# Altium PCB ROL2-C1.PcbDoc
Units mm, origin at the board's own origin, x right, y up, seen from the top; angles counter-clockwise.
Board outline 62 x 50 mm, 2 copper layers (Top Layer, Bottom Layer); 71 components, 64 nets, 253 pads, 75 vias.
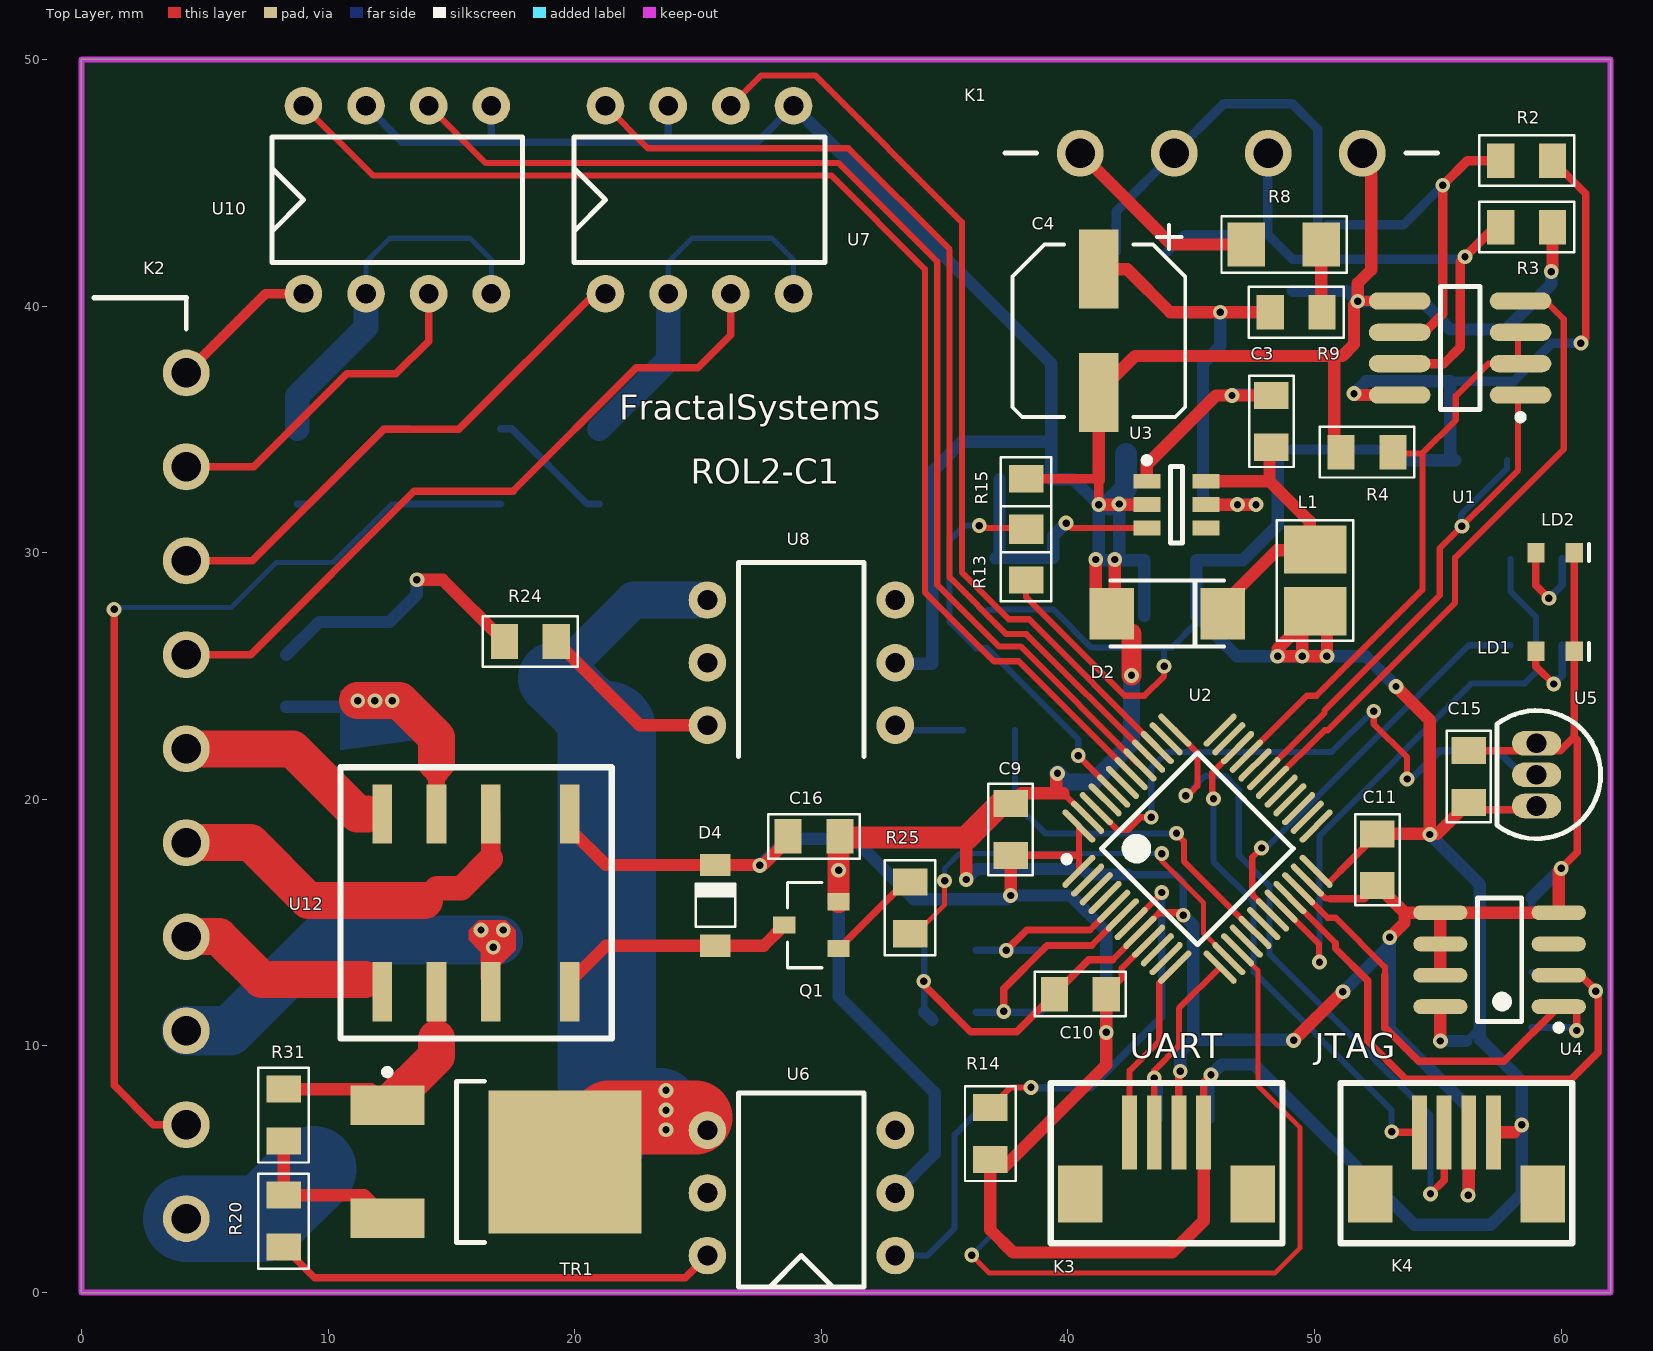
[diagram p0: Top Layer view]
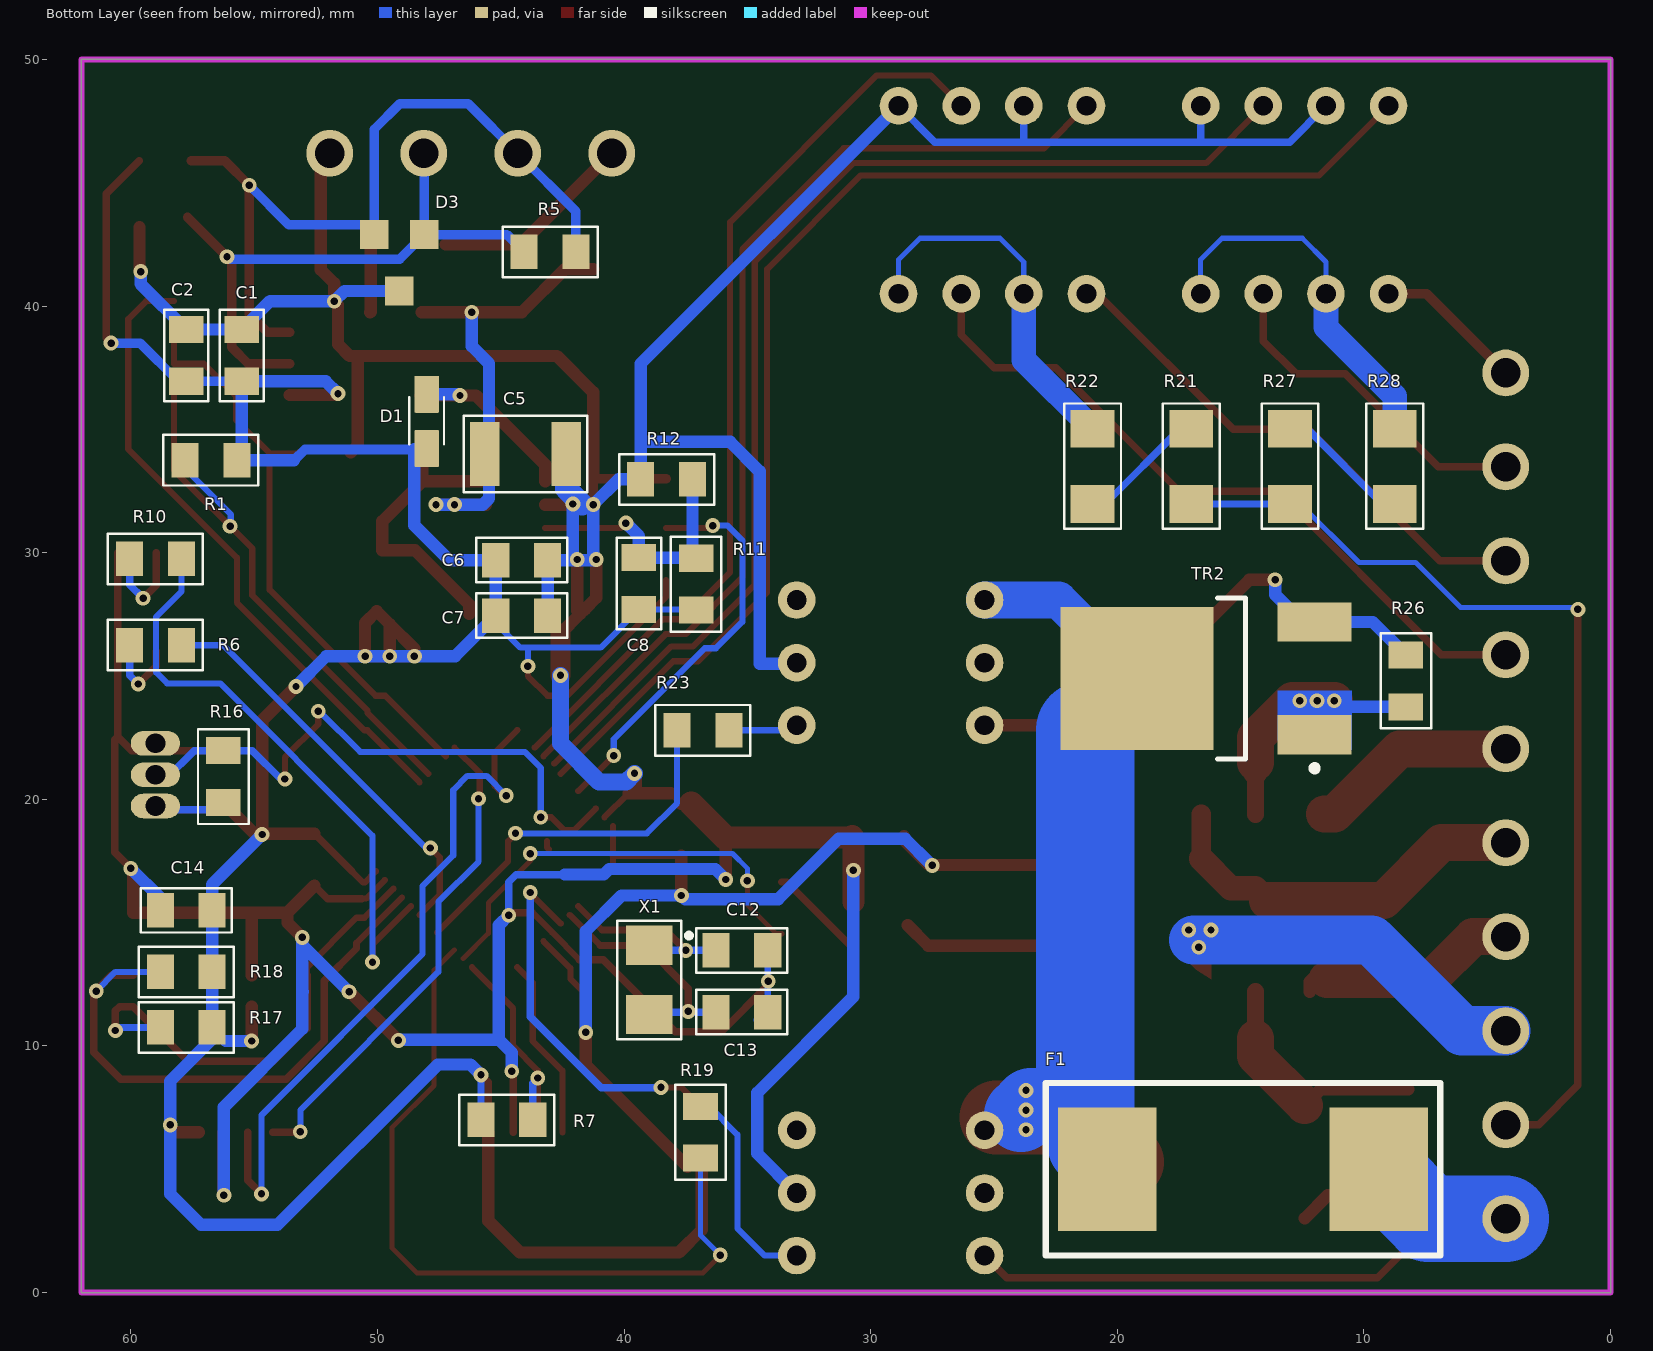
[diagram p1: Bottom Layer view, seen from below]

## Layer stack, top to bottom
Top Solder: solder mask 0.0102, Solder Resist, Dk 3.5
Top Layer: signal copper 0.0356
Dielectric 1: dielectric 0.32, FR-4, Dk 4.8
Bottom Layer: signal copper 0.0356
Bottom Solder: solder mask 0.0102, Solder Resist, Dk 3.5

## Board outline
0,0 0,50 62,50 62,0

## Design rules (kind name [scope] priority, off if disabled: settings)
Clearance ClearanceEdge [All vs OnLayer('Keep-Out Layer')] p1: gap=0.102
Clearance [All] p2: gap=0.203
DiffPairsRouting [All] p1: maxlimit=0.254 minlimit=0.254 mostfreqgap=0.254 toplayer_minwidth=0.381 toplayer_maxwidth=0.381 toplayer_prefwidth=0.381 bottomlayer_minwidth=0.381 bottomlayer_maxwidth=0.381 bottomlayer_prefwidth=0.381 maxuncoupledlength=12.7
HoleSize [All] p1: absolutevalues=TRUE maxlimit=6 minlimit=0.3 maxpercent=80.000 minpercent=20.000
HoleToHoleClearance [All] p1: gap=0.127 allowstackedmicrovias=TRUE
MinimumAnnularRing [All] p1: minimumring=0.15
MinimumSolderMaskSliver SilkscreenOverComponentPads [All] p2: minsoldermaskwidth=0.254
PolygonConnect [All] p1: connectstyle=Relief reliefconductorwidth=0.254 reliefentries=4 polygonreliefangle="90 Angle" airgapwidth=0.254
RoutingVias [All] p1: holewidth=0.711 width=1.27 viastyle="Through Hole" minholewidth=0.711 minwidth=1.27 maxholewidth=0.711 maxwidth=1.27
SilkToSilkClearance [All] p1: silktosilkclearance=0.2
SilkToSolderMaskClearance [IsPad] p1: minsilkscreentomaskgap=0.1 clearancetoexposedcopper=TRUE
SolderMaskExpansion [All] p1: expansion=0.1
UnpouredPolygon [All] p1: allowunpoured=FALSE
Width [All] p1: maxlimit=12.7 minlimit=0.203 preferedwidth=0.254
24 further rules are at their usual default settings.

## Classes and differential pairs
component class ROL2-C1-P01: C1 C2 C3 C4 C5 C6 C7 C8 C9 C10 C11 C12 C13 C14 C15 D1 D2 D3 K1 K3 K4 L1 LD1 LD2 R1 R2 R3 R4 R5 R6 R7 R8 R9 R10 R11 R12 R13 R14 R15 R16 R17 R18 U1 U2 U3 U4 U5 X1
component class ROL2-C1-P02: C16 D4 F1 K2 Q1 R19 R20 R21 R22 R23 R24 R25 R26 R27 R28 R31 TR1 TR2 U6 U7 U8 U10 U12
differential pair RS485: +RS485_P -RS485_N

## Components (designator, comment, footprint, x,y, rotation, side; value= is the part's Value field where it differs from the comment)
C1 "100n" CC0805-1 55.5,38 r270 bottom
C2 "1u" CC0805-1 57.75,38 r270 bottom
C3 "100n" CC0805-1 48.25,35.325 r90 top
C4 "10u" CAPPS-D6.3X7.7 41.25,39 r270 top
C5 "1u" CC1210-1 44,34 r0 bottom
C6 "10u" CC0805-1 44.15,29.7 r0 bottom
C7 "10u" CC0805-1 44.15,27.45 r0 bottom
C8 "DNI" CC0805-1 39.4,28.75 r270 bottom
C9 "100n" CC0805-1 37.675,18.775 r270 top
C10 "100n" CC0805-1 40.5,12.1 r0 top
C11 "100n" CC0805-1 52.55,17.55 r90 top
C12 "20p" CC0805-1 35.225,13.875 r0 bottom
C13 "20p" CC0805-1 35.225,11.375 r0 bottom
C14 "100n" CC0805-1 57.75,15.5 r180 bottom
C15 "100n" CC0805-1 56.25,20.925 r270 top
C16 "1u" CC0805-1 29.7,18.5 r180 top
D1 "1N4148" SOD323 48,35.325 r90 bottom
D2 "SS110B" DO-214AC 44.025,27.525 r0 top
D3 "PESD12VL2BT" SOT-23_NUP2105L(Primary) 48.1,42.9 r270 bottom
D4 "1N4148" SOD-123 25.7,15.7 r270 top
F1 "4A" FUSE-SMD-12mm 14.9,5 r180 bottom
K1 "Terminal Block Connector, 3.81mm, Right Angle" CONN_3.81_4 40.5,46.2 r0 top
K2 "Terminal Block Connector, 3.81mm, Right Angle" CONN_3.81_10 4.25,3 r90 top locked
K3 "BM04B-SRSS-TB" JST-SH-4pin 44,4 r180 top locked
K4 "BM04B-SRSS-TB" JST-SH-4pin 55.75,4 r180 top locked
L1 "10uH" IND-LQH32CN4R7M33l 50.025,28.875 r270 top
LD1 "GREEN" LEDGREENC190 59.75,26 r180 top
LD2 "YELLOW" LEDYELLOWC190 59.75,30 r180 top
Q1 "PMV40UN" SOT23-1 29.6,14.9 r180 top
R1 "10K" RC0805-1 56.75,33.75 r180 bottom
R2 "47K" RC0805-1 58.6,45.9 r0 top
R3 "47K" RC0805-1 58.6,43.2 r180 top
R4 "10K" RC0805-1 52.125,34.075 r0 top
R5 "DNI" RC0805-1 43,42.2 r0 bottom
R6 "470R" RC0805-1 59,26.25 r0 bottom
R7 "10K" RC0805-1 44.75,7 r180 bottom
R8 "FUSE" RC1206-1 48.75,42.5 r0 top
R9 "10R" RC0805-1 49.25,39.75 r0 top
R10 "470R" RC0805-1 59,29.75 r0 bottom
R11 "31K6" RC0805-1 37.075,28.725 r270 bottom
R12 "10K" RC0805-1 38.275,32.975 r180 bottom
R13 "DNI" RC0805-1 38.3,29.95 r270 top
R14 "10K" RC0805-1 36.85,6.45 r90 top
R15 "10K" RC0805-1 38.3,31.95 r90 top
R16 "10K" RC0805-1 56.25,20.925 r90 bottom
R17 "10K" RC0805-1 57.75,10.75 r0 bottom
R18 "10K" RC0805-1 57.75,13 r0 bottom
R19 "470R" RC0805-1 36.9,6.5 r270 bottom
R20 "470R" RC0805-1 8.2,2.9 r270 top
R21 "120K" RC1206-1 17,33.5 r90 bottom
R22 "120K" RC1206-1 21,33.5 r90 bottom
R23 "470R" RC0805-1 36.8,22.8 r0 bottom
R24 "470R" RC0805-1 18.2,26.4 r0 top
R25 "100R" RC0805-1 33.6,15.6 r270 top
R26 "DNI" RC0805-1 8.3,24.8 r90 bottom
R27 "120K" RC1206-1 13,33.5 r90 bottom
R28 "120K" RC1206-1 8.75,33.5 r90 bottom
R31 "DNI" RC0805-1 8.2,7.2 r270 top
TR1 "MAC4DHMT4G" ONSC-DPAK-3-369C-01_V 16.8,5.3 r0 top
TR2 "MAC4DHMT4G" ONSC-DPAK-3-369C-01_V 16.4,24.9 r0 bottom
U1 "SN65HVD08P" M08A_M 55.9,38.3 r180 top locked
U2 "STM32F030C8T6" STM-LQFP48_N 45.25,18 r45 top locked
U3 "MCP16331" MCHP-SOT-23-CH6_N 44.4,31.95 r0 top locked
U4 "LM75AIM" M08A_N 57.5,13.5 r180 top
U5 "DS18B20" TO92 59,21 r180 top
U6 "MOC3023" DIP6 33,1.5 r180 top
U7 "TLP620" DIP8 21.25,40.5 r90 top
U8 "MOC3023" DIP6 33,23 r180 top
U10 "TLP620" DIP8 9,40.5 r90 top
U12 "IM21GR" RELAY-SMD-2A 16,15.8 r180 top locked
X1 "8MHz" OSCCC150X320X9-2N_big 38.975,12.675 r270 bottom

## Footprints (in the part's own frame and the unit in brackets; to place one, negate y for a bottom-side part, rotate by r counter-clockwise, add the part's x,y. Pads: shape width x height; smd on the part's side, far side on the other; paste and mask are expansions set on the pad)
CAPPS-D6.3X7.7 [mm] "Capacitor polarised SMD D6.3; 6.6x6.6x7.7mm"
  rect 3.2x1.6 smd: 1(-2.5,0) 2(2.5,0)
  silkscreen extent -4.3,-3.5 3.5,3.5, body extent -3.3,-3.3 3.3,3.3, height 7.71
CC0805-1 [mm] "Chip capacitor  0805"
  rect 1.1x1.4 smd: 1(-1.05,0) 2(1.05,0)
  silkscreen extent -1.85,-0.9 1.85,0.9, body extent -1,-0.63 1,0.63, height 1
CC1210-1 [mm] "Chip capacitor 1210 (3225)"
  rect 1.2x2.6 smd: 1(-1.65,0) 2(1.65,0)
  silkscreen extent -2.5,-1.55 2.5,1.55, body extent -1.6,-1.25 1.6,1.25, height 1.5
CONN_3.81_4 [mm]
  round 1.9 hole 1.2: 1(0,0) 2(3.81,0) 3(7.62,0) 4(11.43,0)
  silkscreen extent -3.05,0 14.48,0
CONN_3.81_10 [mm]
  round 1.9 hole 1.2: 1(0,0) 2(3.81,0) 3(7.62,0) 4(11.43,0) 5(15.24,0) 6(19.05,0) 7(22.86,0) 8(26.67,0) 9(30.48,0) 10(34.29,0)
  silkscreen extent 36.07,0 37.34,3.75
DIP6 [mil]
  round 60 hole 31.5: 1(0,0) 2(0,-100) 3(0,-200) 4(300,-200) 5(300,-100) 6(300,0)
  silkscreen extent 50,-260 250,50
DIP8 [mil]
  round 60 hole 31.5: 1(0,0) 2(0,-100) 3(0,-200) 4(0,-300) 5(300,-300) 6(300,-200) 7(300,-100) 8(300,0)
  silkscreen extent 50,-350 250,50
DO-214AC [mm]
  rect 1.8x2.1 smd: A(-2.25,0) K(2.25,0)
  silkscreen extent -2.3,-1.33 2.3,1.35, body extent -2.3,-1.43 2.3,1.5, height 2.61
FUSE-SMD-12mm [mm] "fuse, 12.1mm X 4.5m X 4.5mm"
  rect 4x5 smd mask+0.051: 1(-5.5,0) 2(5.5,0)
  silkscreen extent -8,-3.5 8,3.5
IND-LQH32CN4R7M33l [mm] "Inductor,Molded Body;3.20mm L X 2.50mm W X 2.20mm H"
  rect 1.95x2.55 smd: 1(-1.25,0) 2(1.25,0)
  silkscreen extent -2.45,-1.55 2.45,1.55, body extent -1.63,-1.28 1.63,1.28, height 2.2
JST-SH-4pin [mm]
  rect 1.8x2.3 smd: 0(3.5,0) ""(-3.5,0)
  rect 0.6x3 smd: 1(-1.5,-2.5) 2(-0.5,-2.5) 3(0.5,-2.5) 4(1.5,-2.5)
  silkscreen extent -4.7,-4.5 4.7,2
LEDGREENC190 [mm] "LED chip C190 1.6x0.8x0.8mm vertical"
  rect 0.7x0.8 smd: 1(-0.775,0) 2(0.775,0)
  silkscreen extent -1.38,-0.35 -1.37,0.35, body extent -0.8,-0.4 0.8,0.4, height 0.8
LEDYELLOWC190 [mm] "LED chip C190 1.6x0.8x0.8mm vertical"
  rect 0.7x0.8 smd: 1(-0.775,0) 2(0.775,0)
  silkscreen extent -1.38,-0.35 -1.38,0.35, body extent -0.8,-0.4 0.8,0.4, height 0.8
M08A_M [mm] "SOIC, 8-Leads, Body 4.9x3.9mm, Pitch 1.27mm, IPC Low Density"
  oval 2.5x0.7 smd: 1(-2.45,1.905) 2(-2.45,0.635) 3(-2.45,-0.635) 4(-2.45,-1.905) 5(2.45,-1.905) 6(2.45,-0.635) 7(2.45,0.635) 8(2.45,1.905)
  silkscreen extent -2.58,-2.5 0.8,2.93, body extent -2,-2.5 2,2.5, height 1.75
M08A_N [mm] "SOIC, 8-Leads, Body 4.9x3.9mm, Pitch 1.27mm, IPC Medium Density"
  oval 2.2x0.6 smd: 1(-2.4,1.905) 2(-2.4,0.635) 3(-2.4,-0.635) 4(-2.4,-1.905) 5(2.4,-1.905) 6(2.4,-0.635) 7(2.4,0.635) 8(2.4,1.905)
  silkscreen extent -2.53,-2.5 0.9,2.88, body extent -2,-2.5 2,2.5, height 1.75
MCHP-SOT-23-CH6_N [mm] "SOT23, 6-Leads, Body 2.9x1.55mm, Pitch 0.95mm, IPC Medium Density"
  rect 1.1x0.6 smd: 1(-1.2,0.95) 2(-1.2,0) 3(-1.2,-0.95) 4(1.2,-0.95) 5(1.2,0) 6(1.2,0.95)
  silkscreen extent -1.32,-1.55 0.25,1.92, body extent -0.9,-1.55 0.9,1.55, height 1.45
ONSC-DPAK-3-369C-01_V [mm] "DPAK, 3-Leads, Body 6.54x6.095mm, Pitch 2.29mm"
  rect 3x1.6 smd: 1(-4.4,2.29) 3(-4.4,-2.29)
  rect 6.2x5.8 smd: 4(2.8,0)
  silkscreen extent -4.52,-3.27 -0.45,3.76, body extent -1.6,-3.27 4.49,3.27, height 2.38
OSCCC150X320X9-2N_big [mm] "Oscillator, 1.5mm X 3.2m X 0.9mm"
  rect 1.6x1.9 smd mask+0.051: 1(-1.4,0) 2(1.4,0)
  silkscreen extent -2.4,-1.3 2.4,1.71, body extent -1.6,-0.8 1.5,0.8, height 2.5
RC0805-1 [mm] "Chip resistor 0805"
  rect 1.1x1.4 smd: 1(-1.05,0) 2(1.05,0)
  silkscreen extent -1.92,-1.02 1.92,1.02, body extent -1.02,-0.64 1.02,0.64, height 0.51
RC1206-1 [mil] "Chip resistor 1206"
  rect 60x70 smd: 1(-60,0) 2(60,0)
  silkscreen extent -99,-45 100,45, body extent -60,-30 60,30, height 22
RELAY-SMD-2A [mm]
  rect 0.8x2.4 smd: 1(-3.8,-3.6) 2(-0.6,-3.6) 3(1.6,-3.6) 4(3.8,-3.6) 5(3.8,3.6) 6(1.6,3.6) 7(-0.6,3.6) 8(-3.8,3.6)
  silkscreen extent -5.5,-5.5 5.5,5.5
SOD323 [mm]
  rrect10% 1.5x1 smd: 1(1.1,0) 2(-1.1,0)
  silkscreen extent -0.92,-0.7 0.98,0.7, body extent -1.3,-0.67 1.3,0.67, height 0.8
SOD-123 [mm]
  rect 0.91x1.22 smd: 1(-1.637,0) 2(1.637,0)
  silkscreen extent -0.88,-0.8 0.87,0.8, body extent -1.93,-0.85 1.93,0.85, height 1.42
SOT23-1 [mm]
  rect 0.9x0.7 smd: 1(-1.1,0.95) 2(-1.1,-0.95) 3(1.1,0)
  silkscreen extent -0.43,-1.73 0.97,1.73, body extent -1.28,-1.55 1.28,1.55, height 1.02
SOT-23_NUP2105L(Primary) [mil]
  rect 46x46 smd: A(0,0) b(0,-80) k(90,-40)
STM-LQFP48_N [mm] "QFP, 48-Leads, Body 7x7mm, Pitch 0.5mm, IPC Medium Density"
  oval 1.8x0.25 smd: 1(-4.05,2.75) 2(-4.05,2.25) 3(-4.05,1.75) 4(-4.05,1.25) 5(-4.05,0.75) 6(-4.05,0.25) 7(-4.05,-0.25) 8(-4.05,-0.75) 9(-4.05,-1.25) 10(-4.05,-1.75) 11(-4.05,-2.25) 12(-4.05,-2.75) 25(4.05,-2.75) 26(4.05,-2.25) 27(4.05,-1.75) 28(4.05,-1.25) 29(4.05,-0.75) 30(4.05,-0.25) 31(4.05,0.25) 32(4.05,0.75) 33(4.05,1.25) 34(4.05,1.75) 35(4.05,2.25) 36(4.05,2.75)
  oval 0.25x1.8 smd: 13(-2.75,-4.05) 14(-2.25,-4.05) 15(-1.75,-4.05) 16(-1.25,-4.05) 17(-0.75,-4.05) 18(-0.25,-4.05) 19(0.25,-4.05) 20(0.75,-4.05) 21(1.25,-4.05) 22(1.75,-4.05) 23(2.25,-4.05) 24(2.75,-4.05) 37(2.75,4.05) 38(2.25,4.05) 39(1.75,4.05) 40(1.25,4.05) 41(0.75,4.05) 42(0.25,4.05) 43(-0.25,4.05) 44(-0.75,4.05) 45(-1.25,4.05) 46(-1.75,4.05) 47(-2.25,4.05) 48(-2.75,4.05)
  silkscreen extent -4.17,-2.75 2.75,3.57, body extent -3.5,-3.5 3.5,3.5, height 1.6
TO92 [mm] "TO92"
  oval 2x1 hole 0.8: 1(0,-1.27) 2(0,0) 3(0,1.27)
  silkscreen extent -2.6,-2.6 1.6,2.6, body extent -2.61,-2.61 1.6,2.61, height 5.33

## Part data
C1 C2 C3 C8 C16: library part CAPCC0805_1U50VX7R, "Capacitor chip ceramic 0805"
C4: library part CAPPS100U25VFP, "Capacitor electrolitic SMD 6.3X6.3X7.7MM low ESR"
C5: library part CAPCC1210_1U100VX7R, "Capacitor chip ceramic 1210"
C6 C7: library part CAPCC0805_10U16VX5R, "Capacitor chip ceramic 0805"
C9 C10 C11 C12 C13 C14 C15: library part CAPCC0805_100N50VX7R, "Capacitor chip ceramic 0805"
D1 D4: library part D-1N4148WS, "Small Signal Diode"
D2: library part CD214A-B240LF-0.3V@1A, "Schottky Diode"
D3: library part NUP2105L, "Diode"
F1: library part FUSE-4A-0464004.DR, "SMD Fuse"
K1: library part CONN_TB_3.81_4PIN, "Terminal Block Connector, 3.81mm, 4pin"
K2: library part CONN_TB_3.81_10PIN, "Terminal Block Connector, 3.81mm, 8pin"
K3 K4: library part JST-SH-BM04B-SRSS-TB, "JST connector 4pin vertical"
L1: library part LQH44PN100MP0L, "Chip Inductor 4 x 4 mm"
LD1: library part LED-GREEN0603V, "LED green HSMG vertical"
LD2: library part LED-YELLOW0603V, "LED yellow HSMY vertical"
Q1: library part Q-PMV40UN, "TrenchMOS ultra low level FET N-channel"
R1 R2 R3 R4 R5 R6 R7 R9 R10 R11 R12 R13 R14 R15 R16 R17 R18 R19 R20 R23 R24 R25 R26 R31: library part RES0805, "Chip Resistor 0805"
R8 R21 R22 R27 R28: library part RES1206, "Chip Resistor 1206"
TR1 TR2: "Sensitive Gate Triacs, 3-Pin DPAK, Pb-Free, Tape and Reel"
U1: "3.3 / 5 V RS-485 Transceiver, 10 Mbps, Half Duplex, -40 to 85 degC, 8-pin PDIP (P), Pb-Free (RoHS)"
U2: "ARM Cortex-M0 32-bit MCU, 64 KB Flash, 8 KB Internal RAM, 39 I/Os, 48-pin LQFP, -40 to 85 degC, Tray"
U3: library part MCP16301T-E/CH, "High-Voltage Input Integrated Switch Step-Down Regulator, 600 mA, Input Voltage 4.0 to 30 V, Output Voltage 2.0 to 15 V, -40 to 125 degC, 6-pin SOT-23 (CH6), Tape and Reel"
U4: "Digital Temperature Sensor and Thermal Watchdog with Two-Wire Interface, 8-pin Narrow SOIC"
U5 U6 U7 U8 U10: "digital temperature sensor"
U12: library part relay-SMD-IM21GR, "relay SMD 250VAC 2A"
X1: library part XTAL-SMD_8MHz, "SMD Crystal 8MHz"

## Via types
v1: diameter 0.6, hole 0.3, Top Layer to Bottom Layer, tented both sides, 75 vias

## Nets (pads, with @x,y where several pads share a name; then routed paths per layer and width w, separated by ;. In a path a pad name is that pad's centre, name@x,y a point inside that pad or via, vN(x,y) a via of type N, cw(c..) or ccw(c..) an arc to the next point about the centre after c; other vN are vias at no path point)
+3V3: C1.2 C2.2 C6.2 C7.2 C8.2 C9.2 C10.2 C11.2 C14.2 C15.2 C16.2 D1.2 D4.1 K3.1 K4.1 L1.2 R1.2 R2.2 R7.1 R11.2 R13.2 R14.1 R16.1 R17.1 R18.1 U1.8 U2.1 U2.9 U2.24 U2.48 U4.8 U5.3 U12.1 | length 202.6
  Top Layer w0.25: R13.2 38.3,28.2 42.3,24.2 43.1,24.2 43.9,25 v1(43.9,25.4) ; U2.1 40.442,17.725 U2.48 ; C10.2 42.175,12.725 42.175,13.157 U2.9 ; U2.24 50.514,16.625 50.575,16.625 51.031,17.081
  Top Layer w0.3: C9.2 40.442,17.725 ; C10.2 C10.2@41.55,12.532 ; K3.1 45.5,8.525 v1(45.8,8.825) ; 51.031,17.081 C11.2 ; C15.2 56.545,19.58 58.85,19.58 U5.3 ; 58.1,6.5 v1(58.4,6.8) ; R2.2 61,44.55 61,38.7 v1(60.8,38.5)
  Top Layer w0.5: U12.1 19.8,18.8 21.263,17.337 D4.1 27.637,17.337 28.65,18.35 C16.2 ; R14.1 36.85,2.55 37.775,1.625 44.225,1.625 45.5,2.9 K3.1 ; R14.1@37.425,5.1 41.55,9.225 v1(41.55,10.55) C10.2 ; v1(37.675,16.1) C9.2 ; v1(51.6,36.45) 51.655,36.395 U1.8@53.55,36.395 ; C11.2 v1@54.675,18.6 ; v1(53.3,24.575) 54.675,23.2 v1@54.675,18.6 ; v1(55.1,10.2) U4.8 ; C15.2 54.975,18.6 v1@54.675,18.6 ; K4.1 58.1,6.5 ; v1(49.5,25.8) L1.2@49.5,27.1 ; v1(49.5,25.8) v1(50.5,25.8) 50.5,27.15 L1.2 L1.2@49.5,27.1 ; v1(49.5,25.8) v1(48.5,25.8) 48.5,26.1 L1.2@49.5,27.1
  Bottom Layer w0.25: R11.2@36.75,27.675 R11.2 37.1,27.7 C8.2 40.95,26.15 43.9,26.15 ; v1(43.9,25.4) 43.9,26.15 ; C7.2 45.2,27.15 44.2,26.15 43.9,26.15
  Bottom Layer w0.3: R7.1 v1(45.8,8.825) v1@45.875,8.9 ; R17.1@56.15,10.2 R17.1 ; R16.1 56.545,19.58 U5.3@58.85,19.58
  Bottom Layer w0.381: C1.2 C2.2 58.075,36.95 59.625,38.5 v1(60.8,38.5)
  Bottom Layer w0.4: D1.2 48.035,34.19 48.5,34.19 52.94,34.19 53.38,33.75
  Bottom Layer w0.5: v1@27.6,17.4 28.6,18.4 31.3,18.4 33.753,15.947 37.522,15.947 v1(37.675,16.1) 40.1,16.1 41.55,14.65 v1(41.55,10.55) ; v1@45.875,8.9 46.225,9.25 47.55,9.25 54.05,2.75 57.15,2.75 58.4,4 v1(58.4,6.8) 58.4,8.575 56.7,10.275 R17.1 C14.2 56.7,16.55 v1(54.675,18.575) ; D1.2@48.5,34.19 48.5,31.1 47.1,29.7 C6.2 C7.2 46.85,25.8 v1(48.5,25.8) v1(49.5,25.8) v1(50.5,25.8) 52.075,25.8 v1(53.3,24.575) ; v1@51.625,36.475 52.1,36.95 C1.2 55.5,33.95 R1.2 53.38,33.75 ; v1(55.1,10.2) R17.1@56.15,10.2
  other v1: 27.5,17.321
+VCC: K1.1 R8.1 | length 8.3
  Top Layer w0.5: K1.1 44.2,42.5 R8.1
GND: C1.1 C2.1 C4.2 C5.1 C6.1 C7.1 C9.1 C10.1 C11.1 C12.1 C13.1 C14.1 C15.1 C16.1 D2.A D3.k K1.4 K3.2 K4.2 LD1.1 LD2.1 Q1.2 R3.1 R4.1 R12.1 R15.2 U1.5 U2.8 U2.23 U2.47 U3.2 U4.4 U4.5 U4.6 U4.7 U5.1 U6.2 U7.5 U7.7 U8.2 U10.5 U10.7 | length 263
  Top Layer w0.25: C9.1 C9.1@38.1,20.25 ; 39.818,20.25 U2.47 ; D2.A@41.475,27.625 D2.A@41.575,27.725 ; 41.811,13.5 U2.8 43.711,15.4 ; U2.23 50.457,15.975 50.625,15.975
  Top Layer w0.3: v1(34.15,12.625) 34.15,12.475 36.05,10.575 37.925,10.575 C10.1 40.85,13.5 41.811,13.5 ; 43.711,15.4 44.575,15.4 v1(44.675,15.3) ; K3.2 44.5,8.925 v1(44.55,8.975) ; 50.625,15.975 52.025,15.975 C11.1 ; C15.1 59.955,21.975 60.525,22.545 ; U4.4 60,15.505 v1(60,17.2) 60.65,17.85 60.65,22.42 60.525,22.545 ; LD2.1 LD1.1 60.525,22.545
  Top Layer w0.4: R15.2 41.2,33 41.25,32.95 v1(41.25,31.95) ; v1@51.75,40.3 51.845,40.205 U1.5@53.55,40.205
  Top Layer w0.5: v1(35.875,16.75) 35.875,18.425 35.9,18.45 ; C9.1@37.275,19.825 C9.1 ; C9.1@38.1,20.25 39.525,20.25 ; v1(39.575,21.05) 39.525,21 39.525,20.25 ; 39.818,20.25 39.525,20.25 ; v1(41.125,29.725) 41.125,28.175 41.575,27.725 D2.A ; v1(41.25,31.95) U3.2 ; 41.25,32.95 C4.2 42.725,37.975 50.825,37.975 ; v1(41.9,29.725) 41.9,27.65 D2.A ; D2.A@42.575,26.725 D2.A ; v1(49.15,10.225) 51.125,12.2 v1(51.15,12.2) ; R4.1 50.8,34.35 50.8,37.95 50.825,37.975 ; K1.4@52.3,46 52.3,41.475 51.75,40.925 51.75,40.3 v1(51.75,40.2) 51.6,40.05 51.6,38.45 51.125,37.975 50.825,37.975 ; C11.1 53.645,15.405 ; v1(53.05,14.4) 53.645,14.995 53.645,15.405 ; U4.7 U4.6 U4.5 ; v1@56.25,4.025 K4.2 ; v1(59.6,41.4) 59.65,41.45 R3.1 ; v1(60,17.2) 59.9,17.1 U4.4 U4.5 ; 53.645,15.405 U4.5
  Top Layer w0.8: v1(42.575,25.025) D2.A@42.575,26.725
  Top Layer w0.9: Q1.2 C16.1@30.7,18.45 ; C16.1 C16.1@30.7,18.45 ; 35.9,18.45 C16.1@30.7,18.45
  Top Layer w1: 35.9,18.45 C9.1@37.275,19.825
  Bottom Layer w0.25: C13.1 C12.1
  Bottom Layer w0.3: U10.7 13.01,46.65 16.575,46.65 ; U10.5 16.62,46.695 16.575,46.65 ; U7.7 23.79,46.665 23.775,46.65 ; U7.5 27.4,46.65 23.775,46.65 ; 42.4,16.95 44.375,16.95 44.675,16.65 v1(44.675,15.3) ; C14.1 C14.1@58.8,16 ; 16.575,46.65 23.775,46.65
  Bottom Layer w0.5: U7.5 39.325,37.665 39.325,34.5 ; v1@30.7,17.1 30.7,12 34.6,8.1 34.6,5.64 U6.2 ; U8.2 33.04,25.5 34.5,25.5 34.5,33.3 35.7,34.5 39.325,34.5 ; C13.1 C13.1@34.5,11.05 ; v1(35.875,16.75) 36.3,17.175 40.6,17.175 40.825,16.95 42.4,16.95 ; v1(41.125,29.725) 41.25,29.85 v1(41.25,31.95) ; v1@41.225,29.7 C6.1 C7.1 ; v1(41.9,29.725) 42.075,29.9 v1@42.075,31.95 ; v1(42.075,31.975) v1@42.075,31.95 ; v1(44.55,8.975) 44.55,9.725 45.075,10.25 ; v1(44.675,15.3) 45.075,14.9 45.075,10.25 ; D3.k 51.336,40.614 v1(51.75,40.2) 54.35,40.2 C1.1 C2.1 59.6,40.9 v1(59.6,41.4) ; v1(49.15,10.225) 49.125,10.25 45.075,10.25 ; v1(51.15,12.2) 53.05,14.1 ; 53.025,12.2 53.05,12.175 ; v1(53.05,14.4) 53.05,14.1 ; v1(56.225,3.95) 56.225,7.525 53.05,10.7 53.05,12.175 ; C14.1@58.8,16 v1(60,17.2) ; 39.325,34.5 R12.1 40.225,32.975 v1(41.25,31.95) ; v1(41.25,31.95) 41.7,31.95 v1@42.075,31.95 ; 53.05,12.175 53.05,14.1
  Bottom Layer w0.7: v1(39.575,21.05) 39.925,20.7 41,20.7 42.575,22.275 v1(42.575,25.025)
  Bottom Layer w0.9: 41.7,31.95 42.35,32.6 C5.1
  other v1: 30.7,17.121
I2C_CLK: R18.2 U2.21 U4.2 | length 24.8
  Top Layer w0.25: U2.21 50.85,14.168 50.85,14.163
  Top Layer w0.3: 50.85,14.163 50.85,13.95 52.15,12.65 52.15,10.2 53.7,8.65 60.4,8.65 61.5,9.75 61.5,12.15 60.785,12.865 U4.2
  Bottom Layer w0.25: R18.2 60.625,13 v1(61.4,12.225)
I2C_DAT: R17.2 U2.22 U4.1 | length 19.3
  Top Layer w0.25: U2.22 50.525,15.2 50.85,15.2 52.85,13.2 52.85,12.875
  Top Layer w0.3: 52.85,10.725 52.85,12.875 ; 52.863,10.738 54.225,9.375 57.68,9.375 U4.1 60.455,11.595 60.625,11.425 v1(60.625,10.625)
  Bottom Layer w0.3: R17.2 60.5,10.75 v1(60.625,10.625)
INP1: U2.39 U7.6 | length 37.4
  Top Layer w0.25: U7.6 27.56,49.35 29.75,49.35 35.7,43.4 35.7,29.2 37.6,27.3 38.425,27.3 U2.39
INP2: U2.40 U7.8 | length 40.7
  Top Layer w0.25: U7.8 22.97,46.4 31.1,46.4 35.2,42.3 35.2,29 37.5,26.7 38.318,26.7 U2.40
INP3: U2.41 U10.6 | length 47.5
  Top Layer w0.25: U10.6 16.4,45.8 30.7,45.8 34.7,41.8 34.7,28.7 37.2,26.2 38.08,26.2 U2.41@42.827,21.452
INP4: U2.42 U10.8 | length 52.5
  Top Layer w0.25: U10.8 11.82,45.3 30.4,45.3 34.2,41.5 34.2,28.4 37,25.6 38.004,25.6 U2.42
INP5: U2.43
INP6: U2.45
LED1: R6.1 U2.19 | length 16.9
  Top Layer w0.25: v1(47.85,18.025) 47.475,17.65 47.475,16.129 U2.19
  Bottom Layer w0.25: v1@47.85,17.85 v1(47.85,18.025) 48.025,18.025 56.25,26.25 R6.1
LED2: R10.1 U2.20 | length 24.5
  Top Layer w0.25: U2.20 50.175,14.136 v1@50.175,13.475
  Bottom Layer w0.25: v1(50.2,13.4) 50.2,18.525 56.375,24.7 58.525,24.7 58.975,25.15 58.975,27.4 57.95,28.425 R10.1
LINE: F1.1 TR1.4 TR2.4 U6.4 U8.4 | length 39.2
  Top Layer w3: TR1.4 21.4,7.1 U6.4@24.9,7.1
  Bottom Layer w0.7: v1@23.9,7.2 24.76,7.2 U6.4
  Bottom Layer w1.5: TR2.4 22.38,28.08 U8.4
  Bottom Layer w3: TR2.4 TR2.4@21.3,22.8 ; F1.1 21.3,5.9 21.3,7.6 23.5,7.6 v1@23.9,7.2
  Bottom Layer w4: 21.3,7.6 TR2.4@21.3,22.8
  other v1: 23.7,6.6 23.7,7.4 23.7,8.2
N: K2.2 R21.1 R27.1 | length 40.3
  Top Layer w0.3: v1(1.325,27.7) 1.325,8.4 2.915,6.81 K2.2
  Bottom Layer w0.203: v1(1.325,27.7) 1.4,27.775 6.075,27.775 7.9,29.6 10.2,29.6 12.576,31.976 R27.1
  Bottom Layer w0.3: R27.1 R21.1
NetC3_1: C3.1 D2.K L1.1 U3.6 | length 12.3
  Top Layer w0.5: U3.6 48.175,32.9 ; D2.K 46.275,27.9 48.475,30.1 49.8,30.1 49.8,31.275 48.175,32.9 ; C3.1 48.175,34.2 48.175,32.9
NetC3_2: C3.2 D1.1 U3.1 | length 8.3
  Top Layer w0.5: U3.1 43.2,33.575 46,36.375 C3.2
  Bottom Layer w0.5: v1(46.65,36.375) 46.7,36.425 D1.1
NetC4_1: C4.1 C5.2 R9.1 U3.5 | length 19.8
  Top Layer w0.5: C4.1 42.4,41.5 44.15,39.75 v1(46.175,39.75) R9.1 ; U3.5 v1(46.875,31.95) v1(47.625,31.95)
  Bottom Layer w0.5: v1(46.175,39.75) 46.175,38.375 45.475,37.675 45.475,32.2 45.725,31.95 v1(46.875,31.95) v1(47.625,31.95)
NetC8_1: C8.1 R11.1 R12.2 U3.3 | length 10.5
  Top Layer w0.25: v1(39.925,31.2) 40.125,31 U3.3
  Bottom Layer w0.5: R11.1 R11.1@37.1,29.8 ; R12.2 37.225,29.925 R11.1@37.1,29.8 ; v1(39.925,31.2) 39.4,30.675 C8.1 R11.1@37.1,29.8
NetC12_2: C12.2 U2.5 X1.1 | length 7.8
  Top Layer w0.25: 40.889,14.7 U2.5
  Top Layer w0.3: v1(37.5,13.875) 38.325,14.7 40.889,14.7
  Bottom Layer w0.3: C12.2 v1(37.5,13.875) X1.1@38.975,13.875
NetC13_2: C13.2 U2.6 X1.2 | length 9.8
  Top Layer w0.25: 40.971,14.075 U2.6
  Top Layer w0.3: v1(37.4,11.4) 37.4,12.325 39.15,14.075 ; 39.075,14 39.15,14.075 ; 40.971,14.075 39.15,14.075
  Bottom Layer w0.3: C13.2 38.875,11.375 X1.2@38.975,11.475
NetD4_2: D4.2 Q1.3 U12.8 | length 10.1
  Top Layer w0.5: U12.8 19.8,12.6 21.263,14.062 D4.2 27.662,14.062 Q1.3
NetF1_2: F1.2 K2.1 | length 6
  Bottom Layer w3.5: K2.1 7.4,3 F1.2
NetK2_3: K2.3 U12.7 | length 14.2
  Bottom Layer w2: K2.3 6.02,10.62 9.7,14.3 16.9,14.3
  other v1: 16.7,14 16.2,14.7 17.1,14.7
NetK2_4: K2.4 U12.5 | length 9.1
  Top Layer w0.5: 11.7,13.1 12.2,12.6 U12.5
  Top Layer w1.5: K2.4 5.57,14.43 7.3,12.7 11.5,12.7
NetK2_5: K2.5 U12.2 | length 15.8
  Top Layer w0.8: 16.6,17.6 U12.2
  Top Layer w1: 13.9,15.9 14.4,16.4 15.4,16.4 16.6,17.6
  Top Layer w1.5: K2.5 6.86,18.24 9.2,15.9 13.9,15.9
NetK2_6: K2.6 U12.4 | length 8.6
  Top Layer w1: K2.6 K2.6@4.7,22.05
  Top Layer w1.5: K2.6 K2.6@4.365,22.165 ; K2.6@4.7,22.05 8.55,22.05 11.2,19.4 11.6,19.4
NetLD1_2: LD1.2 R6.2 | length 3.3
  Top Layer w0.3: LD1.2 58.975,25.4 v1(59.7,24.675)
  Bottom Layer w0.3: v1(59.7,24.675) 60.05,25.025 R6.2
NetLD2_2: LD2.2 R10.2 | length 3.9
  Top Layer w0.3: LD2.2 58.975,28.675 v1(59.5,28.15)
  Bottom Layer w0.3: v1(59.5,28.15) 60.05,28.7 R10.2
NetQ1_1: Q1.1 R25.1 | length 4
  Top Layer w0.3: Q1.1 33.4,16.65 R25.1
NetR8_2: R8.2 R9.2 | length 2.8
  Top Layer w0.5: R8.2 50.274,39.776 R9.2
NetR13_1: R13.1 R15.1 U2.44 | length 16.8
  Top Layer w0.25: v1(36.4,31.1) 36.3,31 R13.1 ; v1@40.4,21.775 v1(40.414,21.775) U2.44
  Bottom Layer w0.25: v1(36.4,31.1) 35.8,31.1 35.2,30.5 35.2,27.2 36.275,26.125 36.725,26.125 40.414,22.436 v1(40.414,21.775)
NetR14_2: R14.2 U2.7 | length 15.3
  Top Layer w0.25: R14.2 37.671,8.321 v1(38.5,8.321) ; U2.7 v1@43.804,16.2
  Top Layer w0.3: v1@43.804,16.2 v1(43.804,16.221)
  Bottom Layer w0.3: v1@38.5,8.3 40.925,8.3 43.804,11.179 v1(43.804,16.221)
NetR19_1: R19.1 U6.1 | length 8.6
  Bottom Layer w0.25: U6.1 34.3,1.5 35.4,2.6 35.4,6.4 36.55,7.55 R19.1
NetR20_1: R20.1 R31.2 TR1.3 | length 6.8
  Top Layer w0.5: R31.2 R20.1 11.46,3.95 TR1.3
NetR20_2: R20.2 U6.6 | length 18.1
  Top Layer w0.3: R20.2 9.45,0.6 24.48,0.6 U6.6
NetR21_2: R21.2 R22.1 | length 5.1
  Bottom Layer w0.3: R21.2 R21.2@17.326,35.024 ; R21.2@17.451,35.024 20.499,31.976 R22.1
NetR22_2: R22.2 U7.2 U7.4 | length 19.1
  Bottom Layer w0.203: R22.2 21,35.05 23.79,37.84
  Bottom Layer w0.21: U7.2 23.79,41.79 24.75,42.75 28,42.75 28.87,41.88 U7.4
  Bottom Layer w1: R22.2 23.79,37.814 23.79,37.84 U7.2
NetR23_1: R23.1 U8.1 | length 2.8
  Bottom Layer w0.25: U8.1 33.2,22.8 R23.1
NetR24_1: R24.1 R26.2 TR2.3 | length 11.5
  Top Layer w0.5: v1(13.6,28.9) 14.65,28.9 R24.1
  Bottom Layer w0.5: R26.2 9.64,27.19 TR2.3 12.49,27.19 13.6,28.3 v1(13.6,28.9)
NetR24_2: R24.2 U8.6 | length 7.5
  Top Layer w0.5: R24.2 22.65,23 U8.6
NetR26_1: R26.1 TR2.1 U12.3 | length 11.1
  Top Layer w0.7: U12.3 14.4,21.1
  Top Layer w1: 14.4,21.1 14.4,21.5
  Top Layer w1.5: v1(11.2,24) v1(11.9,24) v1(12.6,24) 12.9,24 14.4,22.5 14.4,21.5
  Bottom Layer w0.5: R26.1 10.86,23.75 TR2.1
NetR27_2: R27.2 R28.1 | length 5.7
  Bottom Layer w0.3: R28.1 9.251,31.976 12.299,35.024 R27.2 ; R27.2@13.024,35.024 R27.2@13.25,35.024
NetR28_2: R28.2 U10.2 U10.4 | length 15.1
  Bottom Layer w0.21: U10.2 11.54,41.79 12.5,42.75 15.75,42.75 16.62,41.88 U10.4
  Bottom Layer w1: R28.2 8.75,36.35 11.54,39.14 U10.2
NetR31_1: R31.1 TR1.1 U12.6 | length 9.9
  Top Layer w0.5: R31.1 11.74,8.25 TR1.1
  Top Layer w0.7: 14.4,10.3 U12.6
  Top Layer w1.5: TR1.1 14.4,9.59 14.4,10.3
ONEW: R16.2 U2.46 U5.2 | length 23.8
  Top Layer w0.25: U2.46 42.025,18.75 42.425,18.75 42.95,19.275 v1(43.375,19.275) ; v1(52.4,23.575) 52.4,23.05 53.75,21.7 v1(53.75,20.825)
  Bottom Layer w0.25: v1(43.375,19.275) 43.375,21.275 44.025,21.925 50.7,21.925 52.35,23.575 v1(52.4,23.575)
  Bottom Layer w0.3: v1(53.75,20.825) 53.925,20.825 55.075,21.975 R16.2 57.425,21.975 U5.2@58.55,20.85
OUT0: R19.2 U2.15 | length 31.4
  Top Layer w0.203: v1@36.1,1.5 36.8,0.8 48.4,0.8 49.4,1.8 49.4,6.7 47.7,8.4 47.7,13.075 U2.15
  Bottom Layer w0.203: v1(36.1,1.521) 36.9,2.321 R19.2
OUT1: R23.2 U2.17 | length 15.3
  Top Layer w0.25: v1@44.4,18.6 44.7,18.3 44.7,17.489 U2.17
  Bottom Layer w0.25: R23.2 37.85,19.85 39.079,18.621 v1(44.4,18.621)
OUT5: U2.29
OUT6: U2.32
RELAY0: R25.2 U2.14 | length 17.8
  Top Layer w0.203: R25.2 33.829,14.55 35,15.721 v1(35,16.7) ; v1(43.8,17.8) 43.8,17.5 45.5,15.8 45.5,14.568 U2.14
  Bottom Layer w0.203: v1(35,16.7) 35,17.2 35.6,17.8 v1(43.8,17.8)
RS485_N: D3.A K1.3 R3.2 R5.2 U1.7 | length 24.7
  Top Layer w0.381: U1.7@53.55,37.665 55.24,37.665 55.9,38.325 55.9,41.8 R3.2@57.7,43.6
  Bottom Layer w0.381: R5.2 44.75,42.9 D3.A ; K1.3 48.1,46.18 D3.A ; v1(56.1,42) 56,41.9 49.1,41.9 D3.A
RS485_P: D3.b K1.2 R2.1 R5.1 U1.6 | length 32.2
  Top Layer w0.381: U1.6@53.55,38.935 54.46,38.935 55.2,39.675 v1(55.2,44.9) 56.2,45.9 R2.1
  Bottom Layer w0.381: R5.1 41.95,43.84 K1.2 46.31,48.2 49.1,48.2 50.132,47.168 D3.b 50.532,43.3 53.6,43.3 v1(55.2,44.9)
RS485_RX: R1.1 U1.1 U2.31 | length 23
  Top Layer w0.25: U2.31 50.396,23.5 50.396,23.596 55.075,28.275 55.075,30.175 58.25,33.35 U1.1@58.25,36.395
  Bottom Layer w0.25: v1@55.95,31.1 55.95,31.55 57.8,33.4 R1.1
  other v1: 55.975,31.075
RS485_TX: U1.4 U2.30 | length 25.9
  Top Layer w0.25: U2.30 50.404,22.8 50.525,22.8 55.7,27.975 55.7,29.8 60.1,34.2 60.1,39.475 59.37,40.205 U1.4@58.25,40.205
SWCLK: K4.3 U2.37 | length 28.1
  Top Layer w0.25: U2.37 45.25,21.889 45.25,20.55 v1@44.975,20.275
  Top Layer w0.3: v1(54.7,4) 55.25,4.55 K4.3
  Bottom Layer w0.25: v1(44.775,20.15) 45.575,20.95 46.35,20.95 46.925,20.375 46.925,17.725 48.175,16.475 48.175,13.725 54.7,7.2 v1(54.7,4)
SWDIO: K4.4 U2.34 | length 20
  Top Layer w0.25: v1@45.85,20.175 45.85,21.075 U2.34
  Top Layer w0.3: v1(53.125,6.525) 53.15,6.5 K4.4
  Bottom Layer w0.25: v1(45.9,20.025) 45.9,17.475 47.525,15.85 47.525,13 53.125,7.4 v1(53.125,6.525)
SWITCH1: K2.7 U7.3 | length 29.1
  Top Layer w0.3: K2.7 6.86,25.86 13.5,32.5 17.5,32.5 22.5,37.5 25,37.5 26.33,38.83 U7.3
SWITCH2: K2.8 U7.1 | length 21.5
  Top Layer w0.3: K2.8 6.92,29.67 12.25,35 15.3,35 20.8,40.5 U7.1
SWITCH3: K2.9 U10.3 | length 13.9
  Top Layer w0.3: K2.9 6.98,33.48 10.75,37.25 12.75,37.25 14.08,38.58 U10.3
SWITCH4: K2.10 U10.1 | length 6.1
  Top Layer w0.4: K2.10 7.46,40.5 U10.1
TX_EN: R4.2 U1.2 U1.3 U2.33 | length 23.9
  Top Layer w0.25: U2.33 49.682,24.2 50.075,24.2 54.375,28.5 54.375,34.025 ; R4.2 53.225,34.025 54.375,34.025 ; U1.3@58.25,38.935 58.25,37.665 57.04,37.665 55.725,36.35 55.725,35.375 54.375,34.025
UART_RX: K3.3 R7.2 U2.13 | length 9.6
  Top Layer w0.25: K3.3 v1(43.5,8.7) 43.5,9 44.5,10 44.5,11.522 U2.13
  Bottom Layer w0.3: v1(43.5,8.7) 43.7,8.5 R7.2
UART_TX: K3.4 U2.12 | length 7.5
  Top Layer w0.25: K3.4 42.5,9 43.7,10.2 43.7,12.561 U2.12
pads on no net: K3. K3.0 K4. K4.0 U2.2 U2.3 U2.4 U2.10 U2.11 U2.16 U2.18 U2.25 U2.26 U2.27 U2.28 U2.35 U2.36 U2.38 U3.4 U4.3 U6.3 U6.5 U8.3 U8.5
copper on no net: | length 0.4
  Top Layer w0.25: 43.05,17.975 43.125,18.05 43.125,18.3

## Keep-outs
Keep-Out Layer:
  the board outline again, w0.254

## Other copper
Top Layer:
  region net NetK2_3: 16.2,12.7 16.2,13.8 15.7,14.3 15.7,14.7 16.1,15.1 17.2,15.1 17.6,14.7 17.6,13.9 16.8,13.1
Bottom Layer:
  region net NetR26_1: 10.5,22 10.5,24.4 13.5,24.4 13.5,22.4

## Silkscreen, mask and mechanical layers (free items; w line width, h text height)
Top Overlay:
  text "FractalSystems" at 21.8,35.4 h1
  text "ROL2-C1" at 24.7,32.8 h1
  text "UART" at 42.5,9.5 h1
  text "JTAG" at 50,9.5 h1
Mechanical 1:
  the board outline again, w0.254